# EAGLE board Spring Terminal OST (EAGLE 7.1.0)
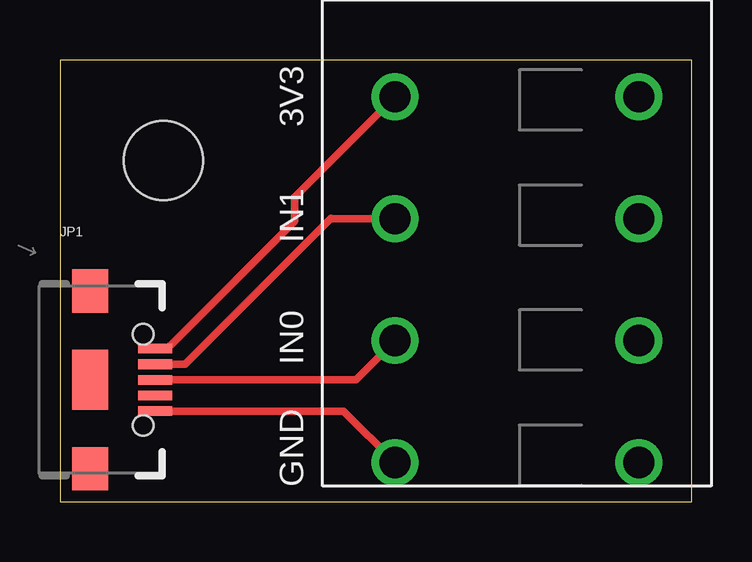
[diagram p0: board, top side]
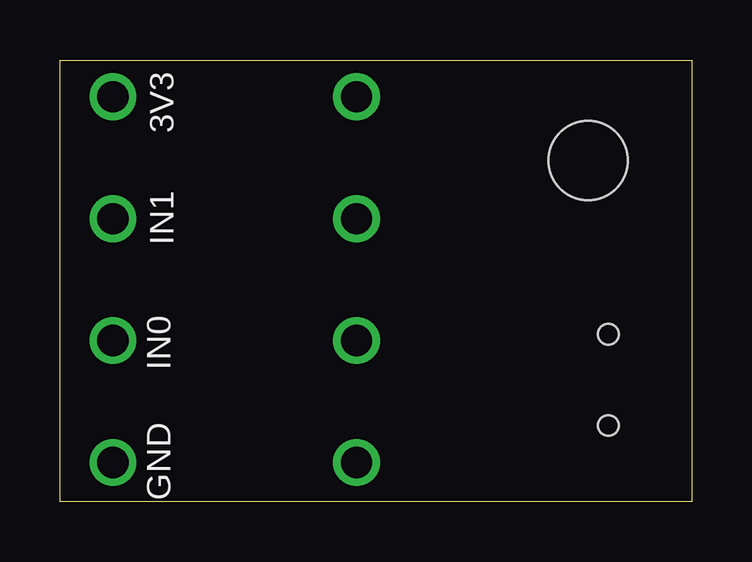
[diagram p1: board, bottom side, seen from below]

Size 26.34 x 18.41 mm. Coordinates in mm from the lower left corner, seen from the top.
Outline: 0,0 26.34,0 26.34,18.41 0,18.41 0,0
Copper layers (1*16): Top 0.035mm / dielectric 1.5mm / Bottom 0.035mm
Design rules "SparkFun": minimum track width 8mil, minimum drill 20mil, track to track 8mil, track to pad 8mil, pad to pad 8mil, via to via 8mil, smd to smd 8mil, copper to edge 10mil, drill to drill 8mil, minimum pad ring 12mil, minimum via ring 10mil, stop-mask expansion 4mil, vias tented up to drill 25mil, thermal gap 10mil

## Footprints (pad centres in the part's own frame; a part is rotated, then mirrored left to right if it is on the bottom)
USB-B-MICRO-SMD_V03 = smd 1.4 x 0.4: D+1 2.7,0; D-1 2.7,0.65; GND1 2.7,-1.3; ID1 2.7,-0.65; VBUS1 2.7,1.3 | smd 1.5 x 1.8: SHIELD1 0,3.7; SHIELD2 0,-3.7 | smd 1.5 x 2.5: SHIELD3 0,0 | hole 0.85: 2.2,1.9; 2.2,-1.9
1X04_SPRING_TERMINAL = drill 1.3 pad 1.9: 1 9.16,-5.08; 2 4.08,-5.08; 3 -1,-5.08; 4 -6.08,-5.08; P$1 9.16,5.08; P$2 4.08,5.08; P$3 -1,5.08; P$4 -6.08,5.08
STAND-OFF = hole 3.302: 0,0

## Placement (x,y rotation side)
JP1  USB  [USB-B-MICRO-SMD_V03]  1.27,5.08 0 top
JP2  [1X04_SPRING_TERMINAL]  19.05,10.79 270 top
U$1  [STAND-OFF]  4.32,14.22 0 top

## Library data of the parts
JP1 JP2 = SparkFun-Connectors
U$1 = SparkFun-Electromechanical

## Nets
3V3: JP1.VBUS1 JP2.4
D+: JP1.D+1 JP2.2
D-: JP1.D-1 JP2.3
GND: JP1.GND1 JP2.1

## Tracks (layer width: path | path; a pad name or v marks a point on that pad's centre or on a via)
3V3
  Top 0.305: JP1.VBUS1 4.47,6.38 9.78,11.68 9.78,12.68 JP2.4
D+
  Top 0.305: JP1.D+1 12.34,5.08 JP2.2
D-
  Top 0.305: JP1.D-1 5.22,5.73 11.18,11.68 11.29,11.79 | 11.29,11.79 11.3,11.81 | JP2.3 11.29,11.79
GND
  Top 0.305: JP1.GND1 11.82,3.78 JP2.1

## Text on the board
tPlace: 3V3 | IN1 | IN0 | GND
bPlace: 3V3 | IN1 | IN0 | GND